# Altium PCB Capstone V2.PcbDoc
Units mil, origin at the board's own origin, x right, y up, seen from the top; angles counter-clockwise.
Board outline 4140 x 3665 mil, 2 copper layers (Top Layer, Bottom Layer), stack 61.756 mil thick; 53 components, 85 nets, 287 pads, 98 vias.
Unrouted connection lines stored in the file: 29.
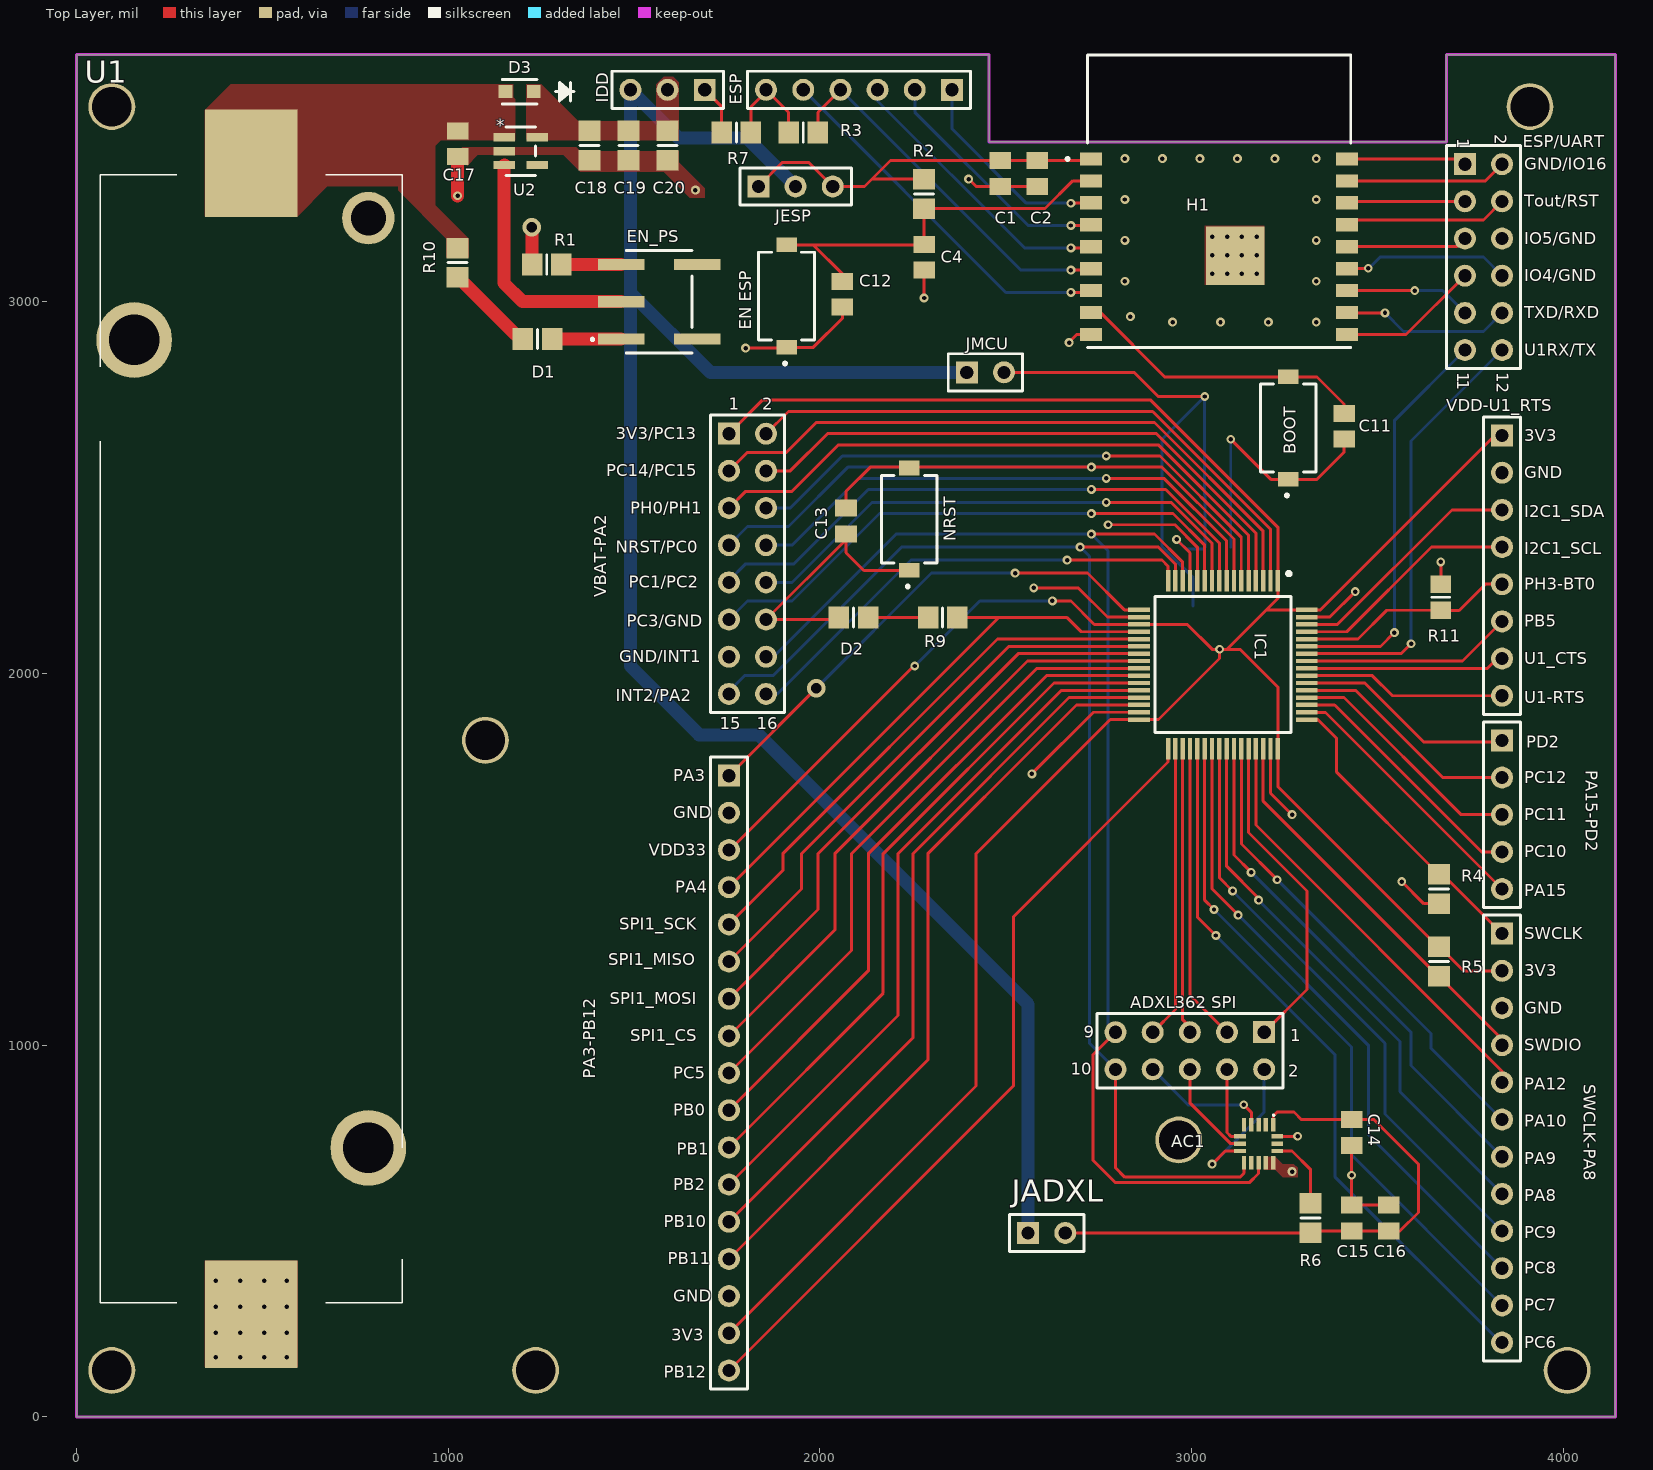
[diagram p0: Top Layer view]
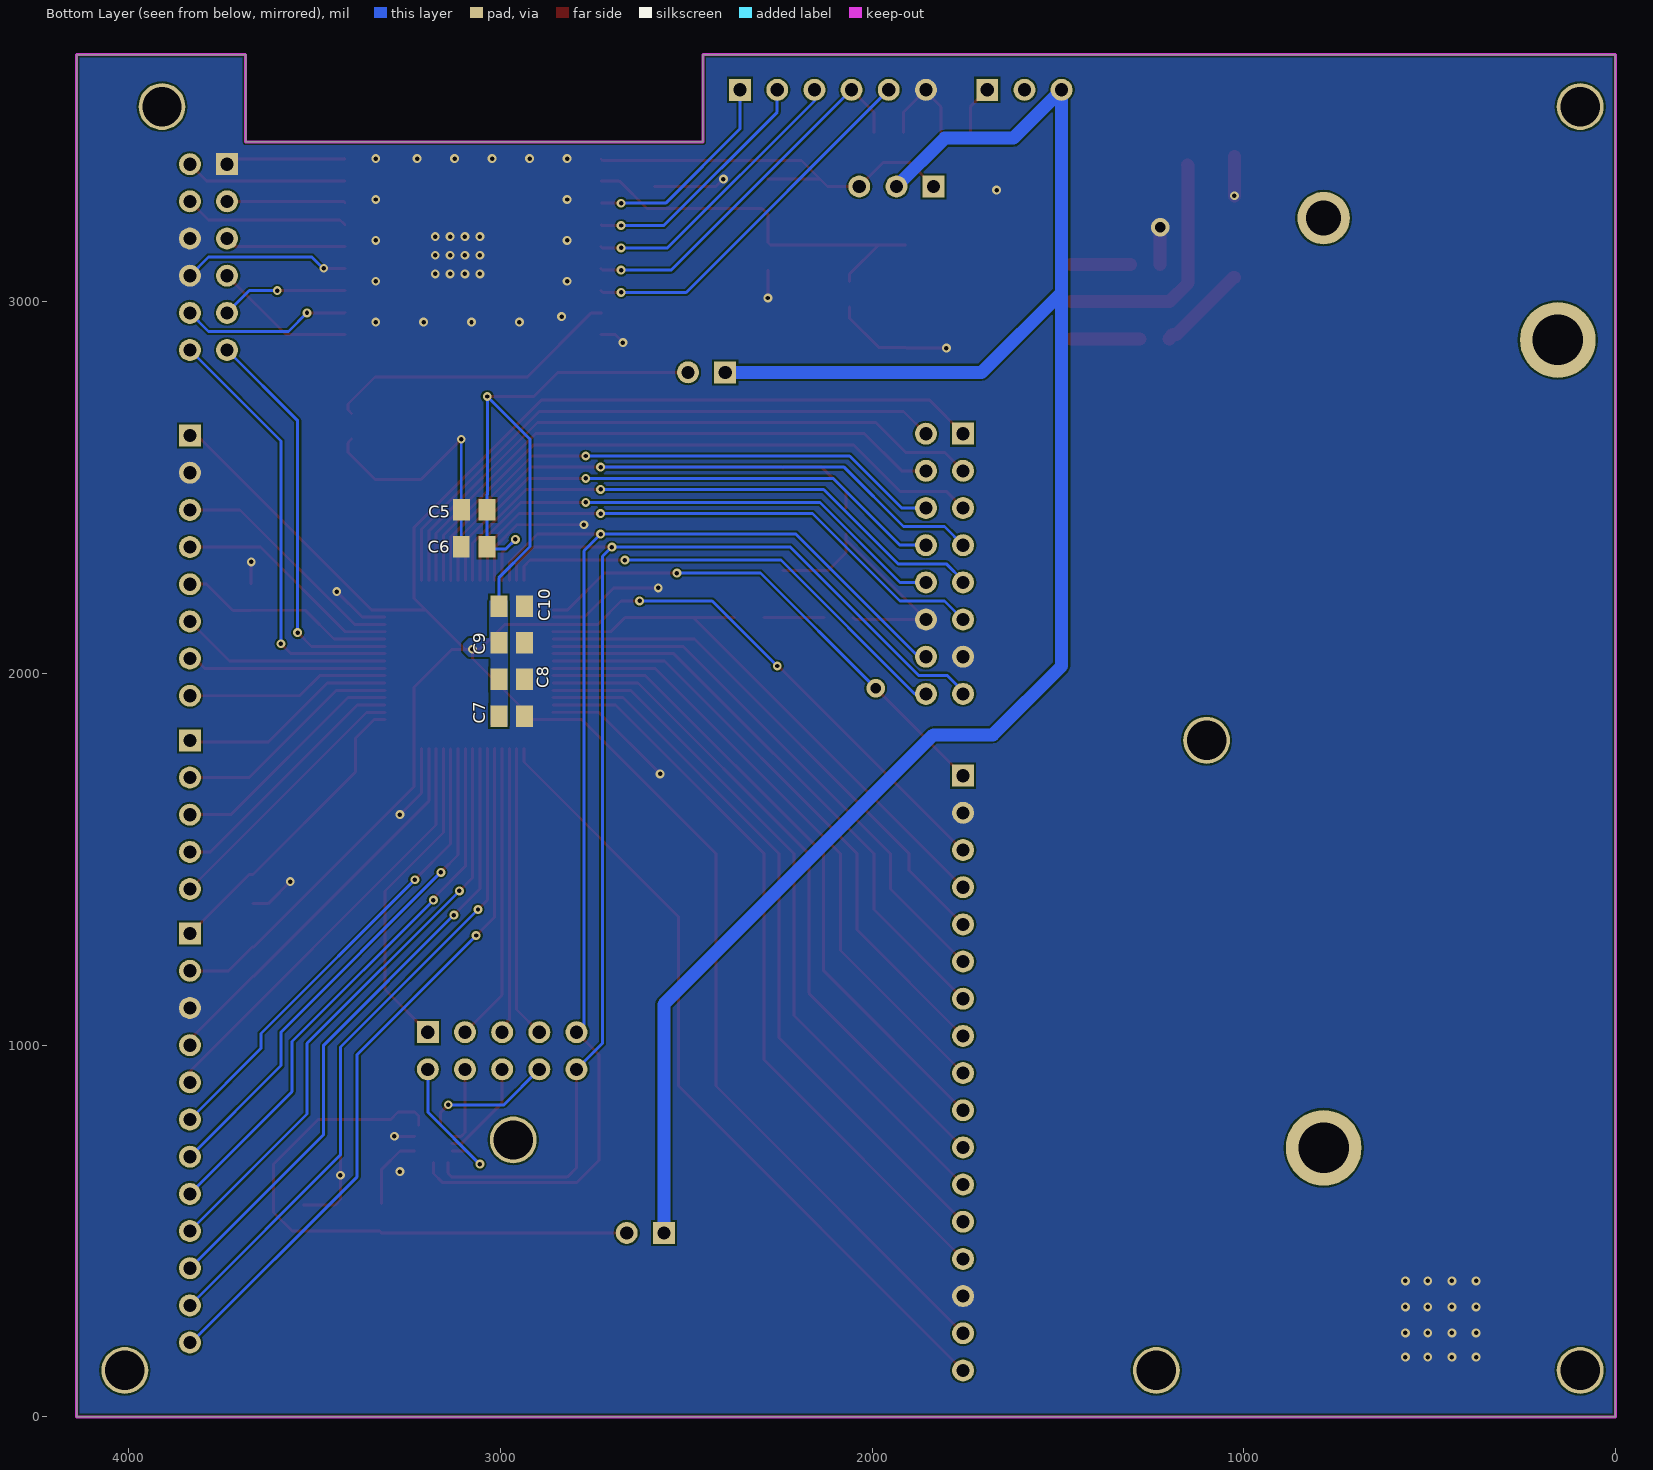
[diagram p1: Bottom Layer view, seen from below]

## Layer stack, top to bottom
Top Solder: solder mask 1, SM-001, Dk 4
Top Layer: signal copper 1.3779
Dielectric 1: core 59, Core-043, Dk 4.3
Bottom Layer: signal copper 1.3779
Bottom Solder: solder mask 1, SM-001, Dk 4

## Board outline
0,0 0,3665 2455,3665 2455,3430 3685,3430 3685,3665 4140,3665 4140,0
cut-out: -830,3120

## Design rules (kind name [scope] priority, off if disabled: settings)
Clearance [All] p1: gap=5 ignorepadtopadclearanceinfootprint=FALSE
DiffPairsRouting [All] p1: maxlimit=10 minlimit=5 mostfreqgap=10 toplayer_minwidth=15 toplayer_maxwidth=15 toplayer_prefwidth=15 bottomlayer_minwidth=15 bottomlayer_maxwidth=15 bottomlayer_prefwidth=15 maxuncoupledlength=500
HoleSize [All] p1: absolutevalues=TRUE maxlimit=200 minlimit=1 maxpercent=80.000 minpercent=20.000
MinimumSolderMaskSliver [All] p1 off: minsoldermaskwidth=0
NetAntennae [All] p1 off: netantennaetolerance=0
PlaneConnect [All] p1: planeconnectstyle=Direct reliefexpansion=15 reliefentries=4 reliefconductorwidth=10 reliefairgap=10
PolygonConnect [All] p1: connectstyle=Direct reliefconductorwidth=10 reliefentries=4 polygonreliefangle="90 Angle" airgapwidth=10
RoutingVias [All] p1: holewidth=12 width=24 viastyle="Through Hole" minholewidth=12 minwidth=24 maxholewidth=28 maxwidth=50
SilkToSilkClearance [All] p1 off: silktosilkclearance=10
SilkToSolderMaskClearance [IsPad] p1 off: minsilkscreentomaskgap=5 clearancetoexposedcopper=TRUE
SolderMaskExpansion [All] p1: expansion=4
Width [All] p1: maxlimit=35 minlimit=5 preferedwidth=8
23 further rules are at their usual default settings.

## Components (designator, comment, footprint, x,y, rotation, side; value= is the part's Value field where it differs from the comment)
AC1 "ADXL362BCCZ-RL7" CC-16-4 3180,735 r270 top
"ADXL362 SPI" "Header 5X2" HDR2X5 3195,1035 r180 top
BOOT "KSR222GLFS" *SW_KSR223GLFG 3260,2660 r90 top
C1 "Cap" *CAPC2012X88N 2485,3345 r270 top value=10uF
C2 "Cap" *CAPC2012X88N 2585,3345 r270 top value=0.1uF
C4 "Cap" *CAPC2012X88N 2280,3120 r270 top value=0.1uF
C5 "Cap" *CAPC2012X88N 3070,2440 r180 bottom value=10nF
C6 "Cap" *CAPC2012X88N 3070.55,2340.59 r180 bottom value=1uF
C7 "Cap" *CAPC2012X88N 2969.49,1885.51 r0 bottom value=4.7uF
C8 "Cap" *CAPC2012X88N 2969.49,1983.85 r0 bottom value=100nF
C9 "Cap" *CAPC2012X88N 2969.49,2082.18 r0 bottom value=100nF
C10 "Cap" *CAPC2012X88N 2969.49,2180.51 r0 bottom value=100nF
C11 "Cap" *CAPC2012X88N 3410,2665 r90 top value=0.1uF
C12 "Cap" *CAPC2012X88N 2060,3020 r90 top value=0.1uF
C13 "Cap" *CAPC2012X88N 2070,2410 r90 top value=0.1uF
C14 "Cap" *CAPC2012X88N 3430,765 r270 top value=1uF
C15 "Cap" *CAPC2012X88N 3430,535 r270 top value=0.1uF
C16 "Cap" *CAPC2012X88N 3530,535 r90 top value=1uF
C17 "Cap" *CAPC2012X88N 1025,3425 r90 top value=1uF
C18 "Cap" 6-0805_M 1380,3420 r90 top value=10uF
C19 "Cap" 6-0805_M 1485,3420 r90 top value=10uF
C20 "Cap" 6-0805_M 1590,3420 r90 top value=4.7uF
D1 "RED_LED" 6-0805_M 1240,2900 r0 top
D2 "GREEN_LED" 6-0805_M 2090,2150 r180 top
D3 "RED_LED" SD0805 1191.75,3565 r180 top
"EN ESP" "KSR222GLFS" *SW_KSR223GLFG 1910,3015 r90 top
EN_PS "GT11MSCBETR" GT11MSCBE 1567.44,3000 r180 top
ESP "Header 6" HDR1X6 2355,3570 r180 top
ESP/UART "Header 6X2" HDR2X6 3735,3370 r270 top
H1 "ESP-WROOM-02D" ESPWROOM02D 3045,3270 r0 top locked
IC1 "STM32L433RCT6" QFP50P1200X1200X160-64N 3084.09,2023.58 r270 top locked
IDD "Header 3" HDR1X3 1690,3570 r180 top
JADXL "Header 2" HDR1X2 2560,495 r0 top
JESP "Header 3" HDR1X3 1834.37,3310 r0 top
JMCU "Header 2" HDR1X2 2395,2810 r0 top
NRST "KSR222GLFS" *SW_KSR223GLFG 2240,2415 r90 top
PA3-PB12 "Header 17" HDR1X17 1755,1725 r270 top
PA15-PD2 "Header 5" HDR1X5 3835,1820 r270 top
R1 "Res1" 6-0805_M 1265,3100 r0 top value=22K
R2 "Res1" 6-0805_M 2280,3290 r270 top value=10K
R3 "Res1" 6-0805_M 1955,3455 r0 top value=10K
R4 "Res1" 6-0805_M 3665,1420 r270 top value=10K
R5 "Res1" 6-0805_M 3665,1225 r90 top value=10k
R6 "Res1" 6-0805_M 3320,535 r270 top value=50
R7 "Res1" 6-0805_M 1775,3455 r0 top value=330K
R9 "Res1" 6-0805_M 2330,2150 r0 top value=470
R10 "Res1" 6-0805_M 1025,3105 r270 top value=470
R11 "Res1" 6-0805_N 3670,2205 r90 top value=10K
SWCLK-PA8 "Header 12" HDR1X12 3835,1300 r270 top
U1 "1042P" 1042P 470.04,1824.41 r90 top
U2 "Part Number: TLV75533PDBVR" DBV5 1195,3405 r0 top value=Value
VBAT-PA2 "Header 8X2" HDR2X8 1755,2645 r270 top
VDD-U1_RTS "Header 8" HDR1X8 3835,2640 r270 top

## Footprints (in the part's own frame and the unit in brackets; to place one, negate y for a bottom-side part, rotate by r counter-clockwise, add the part's x,y. Pads: shape width x height; smd on the part's side, far side on the other; paste and mask are expansions set on the pad)
6-0805_M [mm] "Chip Resistor, Body 2.0x1.2mm, IPC Low Density"
  rect 1.4x1.5 smd: 1(-1,0) 2(1,0)
  silkscreen extent 0,-0.65 0,0.65, body extent -1.07,-0.7 1.07,0.7, height 0.7
6-0805_N [mm] "Chip Resistor, Body 2.0x1.2mm, IPC Medium Density"
  rect 1.2x1.4 smd: 1(-0.9,0) 2(0.9,0)
  silkscreen extent 0,-0.6 0,0.6, body extent -1.07,-0.7 1.07,0.7, height 0.7
1042P [mm]
  round 5.175 hole 3.45: 1(-27.955,-8) 2(27.245,8)
  round 3.585 hole 2.39: 3(35.575,-8)
  rect 7.34x6.35 smd: 4(-39.33,0) 5(39.33,0)
  silkscreen extent -38.53,-10.33 38.53,10.33, body extent -42.37,-10.33 42.37,10.33, height 14.1
*CAPC2012X88N [mm]
  rect 1.16x1.47 smd: 1(-0.875,0) 2(0.875,0)
*SW_KSR223GLFG [mm]
  rect 1x1.4 smd: 1(-3.5,0) 2(3.5,0)
  silkscreen extent -4.7,-1.9 3,1.9
CC-16-4 [mm]
  rect 0.925x0.3 smd: 1(-1.288,1) 2(-1.288,0.5) 3(-1.288,0) 4(-1.288,-0.5) 5(-1.288,-1) 9(1.287,-1) 10(1.287,-0.5) 11(1.287,0) 12(1.287,0.5) 13(1.287,1)
  rect 0.3x0.8 smd: 6(-0.5,-1.275) 7(0,-1.275) 8(0.5,-1.275) 14(0.5,1.275) 15(0,1.275) 16(-0.5,1.275)
  silkscreen extent -1.98,1 -1.93,1.04
DBV5 [mil]
  rect 58x22 smd paste+0 mask+0: 1(-44,37.4) 2(-44,0) 3(-44,-37.4) 4(44,-37.4) 5(44,37.4)
  silkscreen extent -40,-65 40,65, body extent 0,0 10,10, height 10
ESPWROOM02D [mm]
  rect 1.5x0.9 smd: 1(-8.025,2.9) 2(-8.025,1.4) 3(-8.025,-0.1) 4(-8.025,-1.6) 5(-8.025,-3.1) 6(-8.025,-4.6) 7(-8.025,-6.1) 8(-8.025,-7.6) 9(-8.025,-9.1) 10(9.475,-9.1) 11(9.475,-7.6) 12(9.475,-6.1) 13(9.475,-4.6) 14(9.475,-3.1) 15(9.475,-1.6) 16(9.475,-0.1) 17(9.475,1.4) 18(9.475,2.9)
  rect 4x4 smd: 19(1.825,-3.71)
  silkscreen extent -9.72,-10 9.72,10
GT11MSCBE [mm]
  rect 3.17x0.76 smd: 1(2.605,2.54) 2(2.605,0) 3(2.605,-2.54) 4(-2.605,2.54) 6(-2.605,-2.54)
  silkscreen extent -2.25,-3.5 4.61,3.5
HDR1X2 [mm] "Connector; Header; 2 Position"
  rect 1.5x1.5 hole 0.9: 1(0,0)
  round 1.5 hole 0.9: 2(2.54,0)
  silkscreen extent -1.27,-1.27 3.81,1.27
HDR1X3 [mm] "Connector; Header; 3 Position"
  rect 1.5x1.5 hole 0.9: 1(0,0)
  round 1.5 hole 0.9: 2(2.54,0) 3(5.08,0)
  silkscreen extent -1.27,-1.27 6.35,1.27
HDR1X5 [mm] "Connector; Header; 5 Position"
  rect 1.5x1.5 hole 0.9: 1(0,0)
  round 1.5 hole 0.9: 2(2.54,0) 3(5.08,0) 4(7.62,0) 5(10.16,0)
  silkscreen extent -1.27,-1.27 11.43,1.27
HDR1X6 [mm] "Connector; Header; 6 Position"
  rect 1.5x1.5 hole 0.9: 1(0,0)
  round 1.5 hole 0.9: 2(2.54,0) 3(5.08,0) 4(7.62,0) 5(10.16,0) 6(12.7,0)
  silkscreen extent -1.27,-1.27 13.97,1.27
HDR1X8 [mm] "Connector; Header; 8 Position"
  rect 1.5x1.5 hole 0.9: 1(0,0)
  round 1.5 hole 0.9: 2(2.54,0) 3(5.08,0) 4(7.62,0) 5(10.16,0) 6(12.7,0) 7(15.24,0) 8(17.78,0)
  silkscreen extent -1.27,-1.27 19.05,1.27
HDR1X12 [mm] "Connector; Header; 12 Position"
  rect 1.5x1.5 hole 0.9: 1(0,0)
  round 1.5 hole 0.9: 2(2.54,0) 3(5.08,0) 4(7.62,0) 5(10.16,0) 6(12.7,0) 7(15.24,0) 8(17.78,0) 9(20.32,0) 10(22.86,0) 11(25.4,0) 12(27.94,0)
  silkscreen extent -1.27,-1.27 29.21,1.27
HDR1X17 [mm] "Connector; Header; 17 Position"
  rect 1.5x1.5 hole 0.9: 1(0,0)
  round 1.5 hole 0.9: 2(2.54,0) 3(5.08,0) 4(7.62,0) 5(10.16,0) 6(12.7,0) 7(15.24,0) 8(17.78,0) 9(20.32,0) 10(22.86,0) 11(25.4,0) 12(27.94,0) 13(30.48,0) 14(33.02,0) 15(35.56,0) 16(38.1,0) 17(40.64,0)
  silkscreen extent -1.27,-1.27 41.91,1.27
HDR2X5 [mm] "Connector; Header; 5x2 Position"
  rect 1.5x1.5 hole 0.9: 1(0,0)
  round 1.5 hole 0.9: 2(0,2.54) 3(2.54,0) 4(2.54,2.54) 5(5.08,0) 6(5.08,2.54) 7(7.62,0) 8(7.62,2.54) 9(10.16,0) 10(10.16,2.54)
  silkscreen extent -1.27,-1.27 11.43,3.81
HDR2X6 [mm] "Connector; Header; 6x2 Position"
  rect 1.5x1.5 hole 0.9: 1(0,0)
  round 1.5 hole 0.9: 2(0,2.54) 3(2.54,0) 4(2.54,2.54) 5(5.08,0) 6(5.08,2.54) 7(7.62,0) 8(7.62,2.54) 9(10.16,0) 10(10.16,2.54) 11(12.7,0) 12(12.7,2.54)
  silkscreen extent -1.27,-1.27 13.97,3.81
HDR2X8 [mm] "Connector; Header; 8x2 Position"
  rect 1.5x1.5 hole 0.9: 1(0,0)
  round 1.5 hole 0.9: 2(0,2.54) 3(2.54,0) 4(2.54,2.54) 5(5.08,0) 6(5.08,2.54) 7(7.62,0) 8(7.62,2.54) 9(10.16,0) 10(10.16,2.54) 11(12.7,0) 12(12.7,2.54) 13(15.24,0) 14(15.24,2.54) 15(17.78,0) 16(17.78,2.54)
  silkscreen extent -1.27,-1.27 19.05,3.81
QFP50P1200X1200X160-64N [mm]
  rect 1.475x0.3 smd: 1(-5.738,3.75) 2(-5.738,3.25) 3(-5.738,2.75) 4(-5.738,2.25) 5(-5.738,1.75) 6(-5.738,1.25) 7(-5.738,0.75) 8(-5.738,0.25) 9(-5.738,-0.25) 10(-5.738,-0.75) 11(-5.738,-1.25) 12(-5.738,-1.75) 13(-5.738,-2.25) 14(-5.738,-2.75) 15(-5.738,-3.25) 16(-5.738,-3.75) 33(5.738,-3.75) 34(5.738,-3.25) 35(5.738,-2.75) 36(5.738,-2.25) 37(5.738,-1.75) 38(5.738,-1.25) 39(5.738,-0.75) 40(5.738,-0.25) 41(5.738,0.25) 42(5.738,0.75) 43(5.738,1.25) 44(5.738,1.75) 45(5.738,2.25) 46(5.738,2.75) 47(5.738,3.25) 48(5.738,3.75)
  rect 0.3x1.475 smd: 17(-3.75,-5.738) 18(-3.25,-5.738) 19(-2.75,-5.738) 20(-2.25,-5.738) 21(-1.75,-5.738) 22(-1.25,-5.738) 23(-0.75,-5.738) 24(-0.25,-5.738) 25(0.25,-5.738) 26(0.75,-5.738) 27(1.25,-5.738) 28(1.75,-5.738) 29(2.25,-5.738) 30(2.75,-5.738) 31(3.25,-5.738) 32(3.75,-5.738) 49(3.75,5.738) 50(3.25,5.738) 51(2.75,5.738) 52(2.25,5.738) 53(1.75,5.738) 54(1.25,5.738) 55(0.75,5.738) 56(0.25,5.738) 57(-0.25,5.738) 58(-0.75,5.738) 59(-1.25,5.738) 60(-1.75,5.738) 61(-2.25,5.738) 62(-2.75,5.738) 63(-3.25,5.738) 64(-3.75,5.738)
  silkscreen extent -6.35,-4.65 4.65,4.65, body extent -6,-6 6,6, height 1.6
SD0805 [mil]
  rect 37.5x35 smd paste+0 mask+0: 1(-38.25,0) 2(38.25,0)
  silkscreen extent -147,-33 47,33, body extent 0,0 10,10, height 10

## Part data
AC1: "Accelerometer", Manufacturer_Name="Analog Devices", Mouser Part Number=584-ADXL362BCCZ-R7, Datasheet Link=http://www.analog.com/media/en/technical-documentation/data-sheets/ADXL362.pdf, Manufacturer_Part_Number=ADXL362BCCZ-RL7, Mouser Price/Stock=https://www.mouser.com/Search/Refine.aspx?Keyword=584-ADXL362BCCZ-R7
"ADXL362 SPI": "Header, 5-Pin, Dual row", LatestRevisionDate=17-Jul-2002, LatestRevisionNote="Re-released for DXP Platform.", Publisher="Altium Limited"
BOOT "EN ESP" NRST: library part KSR223GLFG, "Switch Tactile N.O. SPST Round Button Gull Wing 0.01A 32VDC 0.2VA 200000Cycles 2N SMD Automotive T/R", Package=None, Digi-Key_Part_Number=401-1704-1-ND, Digi-Key_Purchase_URL=https://www.digikey.com/product-detail/en/c-k/KSR223GLFG/401-1704-1-ND/958078?utm_source=snapeda&utm_medium=aggregator&utm_campaign=symbol, MF=C&K, MP=KSR223GLFG, SnapEDA_Link=https://www.snapeda.com/parts/KSR223GLFG/C%26K/view-part/?ref=snap
C1 C2 C4 C5 C6 C7 C8 C9 C10 C11 C12 C13 C14 C15 C16 C17 C18 C19 C20: "Capacitor", LatestRevisionDate=17-Jul-2002, LatestRevisionNote="Re-released for DXP Platform.", PackageDescription="Radial Cap, Thru-Hole; 2 Leads; 0.3 in Pin Spacing", PackageReference=RAD-0.3, Published=8-Jun-2000, Publisher="Altium Limited"
D1 D2: library part LED3, "Typical BLUE SiC LED", DatasheetVersion=16-Apr-2002, LatestRevisionDate=17-Dec-2003, LatestRevisionNote="PCB Footprint replaced.", PackageDescription="SM LED; 2 C-Bend Leads; Body 3.5 x 2.8 x 1.9 mm, inc leads (LxWxH typ)", PackageReference=3.5X2.8X1.9, PackageVersion=16-Apr-2002, Published=8-Jun-2000, Publisher="Altium Limited"
D3: library part "D Schottky", "Schottky Diode", Code_JEDEC=DO-214-AA, LatestRevisionDate=17-Jul-2002, LatestRevisionNote="Re-released for DXP Platform.", PackageDescription="DO-214-AA/SMB; 2 C-Bend Leads; Body 5.3 x 3.6 mm, inc. leads (LxW)", PackageReference=SMB, Published=8-Jun-2000, Publisher="Altium Limited"
EN_PS: "Switch", Manufacturer_Name="C & K COMPONENTS", Mouser Part Number=611-GT11MSCBETR, Datasheet Link=https://componentsearchengine.com/Datasheets/1/GT11MSCBETR.pdf, Manufacturer_Part_Number=GT11MSCBETR, Mouser Price/Stock=https://www.mouser.com/Search/Refine.aspx?Keyword=611-GT11MSCBETR
ESP: "Header, 6-Pin", LatestRevisionDate=17-Jul-2002, LatestRevisionNote="Re-released for DXP Platform.", Publisher="Altium Limited"
ESP/UART: "Header, 6-Pin, Dual row", LatestRevisionDate=17-Jul-2002, LatestRevisionNote="Re-released for DXP Platform.", Publisher="Altium Limited"
H1: "Hardware", Manufacturer_Name=Espressif, Mouser Part Number=356-ESPWROOM-02D, Datasheet Link=https://br.mouser.com/datasheet/2/891/esp-wroom-02d_esp-wroom-02u_datasheet_en-1365835.pdf, Height=3.2mm, Manufacturer_Part_Number=ESP-WROOM-02D
IC1: "Integrated Circuit", Manufacturer_Name=STMicroelectronics, Mouser Part Number=511-STM32L433RCT6, Datasheet Link=https://www.st.com/resource/en/datasheet/stm32l433rc.pdf, Height=1.6mm, Manufacturer_Part_Number=STM32L433RCT6, Mouser Price/Stock=https://www.mouser.com/Search/Refine.aspx?Keyword=511-STM32L433RCT6
IDD JESP: "Header, 3-Pin", LatestRevisionDate=17-Jul-2002, LatestRevisionNote="Re-released for DXP Platform.", Publisher="Altium Limited"
JADXL JMCU: "Header, 2-Pin", LatestRevisionDate=17-Jul-2002, LatestRevisionNote="Re-released for DXP Platform.", Publisher="Altium Limited"
PA3-PB12: "Header, 17-Pin", LatestRevisionDate=17-Jul-2002, LatestRevisionNote="Re-released for DXP Platform.", Publisher="Altium Limited"
PA15-PD2: "Header, 5-Pin", LatestRevisionDate=17-Jul-2002, LatestRevisionNote="Re-released for DXP Platform.", Publisher="Altium Limited"
R1 R2 R3 R4 R5 R6 R7 R9 R10 R11: "Resistor", LatestRevisionDate=17-Jul-2002, LatestRevisionNote="Re-released for DXP Platform.", PackageDescription="Axial Device, Thru-Hole; 2 Leads; 0.3 in Pin Spacing", PackageReference=AXIAL-0.3, Published=8-Jun-2000, Publisher="Altium Limited"
SWCLK-PA8: "Header, 12-Pin", LatestRevisionDate=17-Jul-2002, LatestRevisionNote="Re-released for DXP Platform.", Publisher="Altium Limited"
U1: "Undefined or Miscellaneous", Manufacturer_Name="Keystone Electronics", Mouser Part Number=534-1042P, Allied_Number=71135189, Allied Price/Stock=https://www.alliedelec.com/keystone-electronics-1042p/71135189/, Datasheet Link=http://www.keyelco.com/product-pdf.cfm?p=13957, Height=14mm, Manufacturer_Part_Number=1042P, Mouser Price/Stock=https://www.mouser.com/Search/Refine.aspx?Keyword=534-1042P
U2: library part TLV75533PDBVR, "No Description Available", Copyright="Copyright (C) 2018 Accelerated Designs. All rights reserved", Manufacturer_Part_Number=TLV75533PDBVR, RefDes=RefDes, Type=DEV, Vendor="Texas Instruments"
VBAT-PA2: "Header, 8-Pin, Dual row", LatestRevisionDate=17-Jul-2002, LatestRevisionNote="Re-released for DXP Platform.", Publisher="Altium Limited"
VDD-U1_RTS: "Header, 8-Pin", LatestRevisionDate=17-Jul-2002, LatestRevisionNote="Re-released for DXP Platform.", Publisher="Altium Limited"

## Free pads (board coordinates)
  round 126 hole 106 unplated: 1(95,3525) 2(95,125) 3(1235,125) 4(1100,1820) 5(4010,125) 6(2965,745) 7(3910,3525)

## Via types
v1: diameter 24, hole 12, Top Layer to Bottom Layer, 96 vias
v2: diameter 50, hole 28, Top Layer to Bottom Layer, 2 vias

## Nets (pads, with @x,y where several pads share a name; then routed paths per layer and width w, separated by ;. In a path a pad name is that pad's centre, name@x,y a point inside that pad or via, vN(x,y) a via of type N, cw(c..) or ccw(c..) an arc to the next point about the centre after c; other vN are vias at no path point)
ADX_IND: IC1.20 PA3-PB12.4 R9.2 | length 1529.8
  Top Layer w8: PA3-PB12.4 2480,2150 ; R9.2 2480,2150 ; IC1.20 2702.83,2112.17 2665,2150 2480,2150
ADXL362_CS: "ADXL362 SPI.2" AC1.8 | length 402.4
  Top Layer w8: v1(3055,680) 3090.32,715.32 AC1.8
  Bottom Layer w8: v1(3055,680) 3195,820 3195,935
ADXL362_INT1: "ADXL362 SPI.9" AC1.11 IC1.14 VBAT-PA2.14 | length 3584.9
  Top Layer w8: v1(2730,2375) 2900,2375 2975.83,2299.17 IC1.14 ; 2795,1035 2735,975 2735,690 2795,630 3155,630 3180,655 AC1.11
  Bottom Layer w8: VBAT-PA2.14 1875,2045 2205,2375 v1(2730,2375) 2775,2330 2775,1055 2795,1035
ADXL362_INT2: "ADXL362 SPI.10" AC1.9 IC1.15 VBAT-PA2.15 | length 3530.8
  Top Layer w8: v1(2700,2340) 2910,2340 2956.14,2293.86 IC1.15 ; 2795,935 2795,670 2820,645 3130,645 3140.63,655.63 AC1.9
  Bottom Layer w8: VBAT-PA2.15 1755,1952.02 1797.98,1995 1875,1995 2220,2340 v1(2700,2340) 2725,2315 2725,2230 2725,1005 2795,935
ADXL362_MISO: "ADXL362 SPI.6" AC1.7 | length 270.4
  Top Layer w8: 2995,935 2995,845 3105,735 AC1.7
ADXL362_MOSI: "ADXL362 SPI.4" AC1.6 | length 209.1
  Top Layer w8: 3095,935 3095,765 3105.31,754.69 AC1.6
ADXL362_SCK: "ADXL362 SPI.8" AC1.4 | length 346.9
  Top Layer w8: v1(3140,839.67) 3160.32,819.35 AC1.4
  Bottom Layer w8: 2895,935 2990.33,839.67 v1(3140,839.67)
EN: "EN ESP.2" C4.1 C12.2 H1.2 R2.2 | length 1065.3
  Top Layer w8: 1910,3152.8 1982.2,3152.8 ; C12.2 2060,3075 1982.2,3152.8 ; H1.2 2680.12,3325.12 2605.63,3250.63 2295.63,3250.63 2280,3235 2280,3159.45 2273.35,3152.8 1982.2,3152.8
GND: "EN ESP.1" AC1.12 AC1.13 AC1.16 BOOT.1 C1.2 C2.2 C4.2 C5.1 C6.1 C7.1 C8.1 C9.1 C10.1 C11.1 C12.1 C13.1 C14.2 C15.1 C16.2 C17.1 C18.1 C19.1 C20.1 D2.2 ESP.6 ESP/UART.1 ESP/UART.6 ESP/UART.8 H1.9 H1.13 H1.18 H1.19 IC1.12 IC1.18 IC1.31 IC1.47 IC1.63 NRST.1 PA3-PB12.2 PA3-PB12.15 R1.1 R3.1 R4.2 R7.2 R11.2 SWCLK-PA8.3 U1.4 U2.2 VBAT-PA2.12 VBAT-PA2.13 VDD-U1_RTS.2 | length 5254.4
  Top Layer w8: v1(1800,2875) 1907.79,2875 1910,2877.2 1982.2,2877.2 2060,2955 C12.1 ; R7.2 1814.37,3524.37 1857.5,3567.5 1915.63,3509.37 R3.1 ; D2.2 2045.63,2145 VBAT-PA2.12 2070,2360 C13.1 2070,2325 2117.79,2277.2 NRST.1 ; v1(2280,3010) C4.2 ; v1(2400,3330) 2419.45,3310.55 C2.2 ; v1(2570,1730) 2735.63,1895.63 IC1.31 ; v1(2575,2230) 2695,2230 2773.46,2151.54 IC1.18 ; v1(2670,2890) 2670,2891.21 2690.52,2911.73 H1.9 ; v1(2775,2400) 2955,2400 3015.2,2339.8 IC1.12 ; v1(3105,2630) 3212.8,2522.2 BOOT.1 3337.2,2522.2 3410,2595 3410,2620.55 C11.1@3400,2630.55 ; IC1.47 3212.05,1677.95 v1(3270,1620) ; AC1.16 3230.35,754.84 3284.84,754.84 v1(3285,755) ; IC1.63 3371.54,2151.54 v1(3440,2220) ; H1.13 3419.13,3090 v1(3475,3090) ; H1.18@3418.86,3385 H1.18 3720.83,3384.17 ESP/UART.1 ; C14.2 v1(3430,650) 3430,585 3445.55,569.45 C16.2 ; v1(3565,1440) 3624.37,1380.63 R4.2 ; R11.2 v1(3670,2300)
  Top Layer w35: v1(1025,3285) C17.1 ; v2(1225,3200) 1225,3100.63 R1.1 R1.1@1225.31,3100.31
  Bottom Layer w8: C6.1 v1(3105,2630) ; v1(3475,3090) 3477.13,3090 3507.13,3120 3785,3120 ESP/UART.8
  other v1: 375.04,160.98 440.04,160.98 505.04,160.98 565.04,160.98 375.04,225.98 440.04,225.98 505.04,225.98 565.04,225.98 375.04,295.98 440.04,295.98 505.04,295.98 565.04,295.98 375.04,365.98 440.04,365.98 505.04,365.98 565.04,365.98 3270,660 2948.75,2945 3077.5,2945 3206.25,2945 3335,2945 2835,2960 2820,3055 3335,3055 3055,3075 3095,3075 3135,3075 3175,3075 3055,3125 3095,3125 3135,3125 3175,3125 2820,3165 3335,3165 3055,3175 3095,3175 3135,3175 3175,3175 2820,3275 3335,3275 1665,3300 2820,3385 2921,3385 3022,3385 3123,3385 3224,3385 3335,3385
I2C1_SCL: IC1.61 VDD-U1_RTS.4 | length 619.4
  Top Layer w8: IC1.61 3417.17,2112.17 3645,2340 VDD-U1_RTS.4
I2C1_SDA: IC1.62 VDD-U1_RTS.3 | length 652.6
  Top Layer w8: IC1.62 3391.85,2131.85 3700,2440 VDD-U1_RTS.3
IO0: BOOT.2 C11.2 H1.8 | length 813.7
  Top Layer w8: H1.8@2727.72,2969.45 2728.27,2970 2755,2970 2927.2,2797.8 BOOT.2 3337.2,2797.8 3410,2725 3410,2709.45 C11.2@3400,2699.45
IO2: ESP.5 H1.7 | length 1001.8
  Top Layer w8: v1(2675,3025) 2724.21,3025 H1.7
  Bottom Layer w8: ESP.5 2500,3025 v1(2675,3025)
IO4: ESP/UART.7 H1.10 | length 382.5
  Top Layer w8: H1.10 3576.73,2911.73 ESP/UART.7
IO5: ESP/UART.5 H1.14 | length 326.1
  Top Layer w8: H1.14 3712.95,3147.95 ESP/UART.5
IO12: ESP.2 H1.4 | length 661.2
  Top Layer w8: v1(2675,3205) 2727.05,3205 H1.4
  Bottom Layer w8: ESP.2 2255,3510 2560,3205 v1(2675,3205)
IO13: ESP.3 H1.5 | length 768.9
  Top Layer w8: v1(2675,3145) 2726.1,3145 H1.5
  Bottom Layer w8: ESP.3 2155,3540 2550,3145 v1(2675,3145)
IO14: ESP.1 H1.3 | length 560.8
  Top Layer w8: v1(2675,3265) H1.3@2727.99,3265
  Bottom Layer w8: ESP.1 2355,3465 2555,3265 v1(2675,3265)
IO15: ESP.4 H1.6 R3.2 | length 1016.7
  Top Layer w8: R3.2 1994.37,3509.37 ESP.4 ; v1(2675,3085) 2725.16,3085 H1.6
  Bottom Layer w8: ESP.4 2540,3085 v1(2675,3085)
IO16: ESP/UART.2 H1.17 | length 435.7
  Top Layer w8: H1.17@3418.15,3325 H1.17 3790.12,3325.12 ESP/UART.2
NetAC1_1: AC1.1 C14.1 C15.2 C16.1 JADXL.2 R6.2 | length 1579.5
  Top Layer w8: JADXL.2 3319.37,495 R6.2 3324.92,500.55 C15.2 C16.1 3560.55,500.55 3610,550 3610,680 3490.55,799.45 C14.1 3295.55,799.45 3275,820 3230,820 3219.37,809.37 AC1.1
NetAC1_14: AC1.14 R6.1 | length 201.3
  Top Layer w8: AC1.14 3269.68,715.32 3320,665 R6.1
NetBT1_1: C17.2 D3.2 R10.1 U1.5 U2.1
NetC18_2: C18.2 C19.2 C20.2 D3.1 IDD.2 U2.5
NetD1_1: D1.1 R10.2 | length 246
  Top Layer w35: R10.2 1026.97,3065.63 1180.57,2912.03 1190.57,2912.03 1200.31,2902.28 1200.31,2899.69 D1.1
NetD1_2: D1.2 EN_PS.1 | length 185.5
  Top Layer w35: D1.2 EN_PS.1
NetD2_1: D2.1 R9.1 | length 161.3
  Top Layer w8: D2.1 R9.1
NetEN_PS_2: EN_PS.2 U2.3 | length 653.6
  Top Layer w35: U2.3 1150,3366.6 1150,3050 1200,3000 EN_PS.2
NetEN_PS_3: EN_PS.3 R1.2 | length 160.5
  Top Layer w35: R1.2 EN_PS.3
NetIDD_1: IDD.1 R7.1 | length 133.9
  Top Layer w8: IDD.1 1735.63,3524.37 R7.1
NRST: C13.2 IC1.7 NRST.2 VBAT-PA2.7 | length 2368.9
  Top Layer w8: C13.2 2070,2490 2135,2555 NRST.2@2237.79,2555 ; NRST.2 2242.2,2555 v1(2730,2555) 2920,2555 3113.62,2361.38 IC1.7
  Bottom Layer w8: VBAT-PA2.7 1805,2395 1915,2395 2075,2555 v1(2730,2555)
PA2: IC1.16 VBAT-PA2.16 | length 1276.4
  Top Layer w8: v1(2665,2305) 2920,2305 2936.46,2288.54 IC1.16
  Bottom Layer w8: VBAT-PA2.16 1885,1945 2245,2305 v1(2665,2305)
PA3: IC1.17 PA3-PB12.1 | length 1369.8
  Top Layer w8: PA3-PB12.1 v2(1990,1960) ; v1(2525,2270) 2720,2270 2818.78,2171.22 IC1.17
  Bottom Layer w8: v2(1990,1960) 2300,2270 v1(2525,2270)
PA8: IC1.41 SWCLK-PA8.8 | length 1504.6
  Top Layer w8: IC1.41 3093.94,1481.06 3180,1395 v1(3180,1390)
  Bottom Layer w8: v1(3180,1390) 3560,1010 3560,875 SWCLK-PA8.8
PA9: IC1.42 SWCLK-PA8.7 | length 1396.5
  Top Layer w8: IC1.42 3113.62,1511.38 v1(3160,1465)
  Bottom Layer w8: v1(3160,1465) 3590,1035 3590,945 SWCLK-PA8.7
PA10: IC1.43 SWCLK-PA8.6 | length 1287.3
  Top Layer w8: IC1.43@3134,1796.98 3134,1541 v1(3230,1445)
  Bottom Layer w8: v1(3230,1445) 3643.5,1031.5 3643.5,991.5 SWCLK-PA8.6
PA12: IC1.45 SWCLK-PA8.5 | length 1172
  Top Layer w8: IC1.45 3172.68,1592.32 3835,930 SWCLK-PA8.5
PA15: IC1.50 PA15-PD2.5 | length 721.8
  Top Layer w8: IC1.50@3310,1895 3360,1895 PA15-PD2.5
PB0: IC1.26 PA3-PB12.10 | length 1771.9
  Top Layer w8: PA3-PB12.10 2130,1200 2130,1515 2609.06,1994.06 IC1.26
PB1: IC1.27 PA3-PB12.11 | length 1840.4
  Top Layer w8: PA3-PB12.11 2170,1140 2170,1515 2629.37,1974.37 IC1.27
PB2: IC1.28 PA3-PB12.12 | length 1908.8
  Top Layer w8: PA3-PB12.12 2210,1080 2210,1515 2649.69,1954.69 IC1.28
PB5: IC1.57 VDD-U1_RTS.6 | length 569.1
  Top Layer w8: IC1.57 3728.43,2033.43 VDD-U1_RTS.6
PB10: IC1.29 PA3-PB12.13 | length 1977.2
  Top Layer w8: PA3-PB12.13 2250,1020 2250,1515 2670,1935 IC1.29
PB11: IC1.30 PA3-PB12.14 | length 2045.6
  Top Layer w8: PA3-PB12.14 2290,960 2290,1515 2600,1825 2690.32,1915.32 IC1.30
PB12: IC1.33 PA3-PB12.17 | length 2162.1
  Top Layer w8: PA3-PB12.17 2520,890 2520,1345 2936.46,1761.46 IC1.33
PC0: IC1.8 VBAT-PA2.8 | length 1490
  Top Layer w8: v1(2770,2525) 2925,2525 3093.94,2356.06 IC1.8
  Bottom Layer w8: VBAT-PA2.8 1925,2345 2105,2525 v1(2770,2525)
PC1: IC1.9 VBAT-PA2.9 | length 1586.7
  Top Layer w8: v1(2730,2495) 2930,2495 3074.25,2350.75 IC1.9
  Bottom Layer w8: VBAT-PA2.9 1755,2250 1800,2295 1930,2295 2130,2495 v1(2730,2495)
PC2: IC1.10 VBAT-PA2.10 | length 1435
  Top Layer w8: v1(2770,2460) 2945,2460 3054.57,2350.43 IC1.10
  Bottom Layer w8: VBAT-PA2.10 1925,2245 2140,2460 v1(2770,2460)
PC3: IC1.11 VBAT-PA2.11 | length 1528.7
  Top Layer w8: v1(2730,2430) 2950,2430 3034.88,2345.12 IC1.11
  Bottom Layer w8: VBAT-PA2.11 1805,2195 1925,2195 2160,2430 v1(2730,2430)
PC5: IC1.25 PA3-PB12.9 | length 1706.5
  Top Layer w8: PA3-PB12.9 2085,1255 2085,1515 2583.74,2013.74 IC1.25
PC6: IC1.37 SWCLK-PA8.12 | length 1939.7
  Top Layer w8: IC1.37 3015,1797.48 3015,1345 v1(3065,1295)
  Bottom Layer w8: v1(3065,1295) 3385,975 3385,646.16 3831.16,200 SWCLK-PA8.12
PC7: IC1.38 SWCLK-PA8.11 | length 1829.1
  Top Layer w8: IC1.38 3035,1797.56 3035,1390 v1(3060,1365)
  Bottom Layer w8: v1(3060,1365) 3430,995 3430,705 SWCLK-PA8.11
PC8: IC1.39 SWCLK-PA8.10 | length 1720.9
  Top Layer w8: IC1.39 3055,1797.24 3055,1420 v1(3125,1350)
  Bottom Layer w8: v1(3125,1350) 3475,1000 3475,760 SWCLK-PA8.10
PC9: IC1.40 SWCLK-PA8.9 | length 1612.8
  Top Layer w8: IC1.40 3074.25,1450.75 v1(3110,1415)
  Bottom Layer w8: v1(3110,1415) 3520,1005 3520,815 SWCLK-PA8.9
PC10: IC1.51 PA15-PD2.4 | length 688.7
  Top Layer w8: IC1.51 3384.68,1915.32 3780,1520 PA15-PD2.4
PC11: IC1.52 PA15-PD2.3 | length 655.5
  Top Layer w8: IC1.52 3410,1935 3725,1620 PA15-PD2.3
PC12: IC1.53 PA15-PD2.2 | length 622.2
  Top Layer w8: IC1.53 3440.31,1954.69 3675,1720 PA15-PD2.2
PC13: IC1.2 VBAT-PA2.2 | length 1651.7
  Top Layer w8: VBAT-PA2.2 1915,2705 2895,2705 3212.05,2387.95 IC1.2
PC14: IC1.3 VBAT-PA2.3 | length 1745.5
  Top Layer w8: VBAT-PA2.3 1805,2595 1910,2595 1990,2675 2900,2675 3192.36,2382.64 IC1.3
PC15: IC1.4 VBAT-PA2.4 | length 1597.8
  Top Layer w8: VBAT-PA2.4 1920,2545 2020,2645 2905,2645 3172.68,2377.32 IC1.4
PD2: IC1.54 PA15-PD2.1 | length 593.1
  Top Layer w8: IC1.54 3465.63,1974.37 3625,1815 3830,1815 PA15-PD2.1
PH0: IC1.5 VBAT-PA2.5 | length 1691.6
  Top Layer w8: VBAT-PA2.5 1800,2490 1925,2490 2050,2615 2910,2615 3152.99,2372.01 IC1.5
PH1: IC1.6 VBAT-PA2.6 | length 1543.9
  Top Layer w8: v1(2770,2585) 2915,2585 3133.31,2366.69 IC1.6
  Bottom Layer w8: VBAT-PA2.6 1920,2445 2060,2585 v1(2770,2585)
PH3-BOOT0: IC1.60 R11.1 VDD-U1_RTS.5 | length 586.5
  Top Layer w8: IC1.60 3447.48,2092.48 3525,2170 3669.57,2170 R11.1 3719.57,2169.57 3790,2240 VDD-U1_RTS.5
RST: ESP/UART.4 H1.15 | length 443.1
  Top Layer w8: H1.15 3431.02,3220 3785,3220 ESP/UART.4
RXD: ESP/UART.10 H1.11 | length 458.7
  Top Layer w8: H1.11 3418.82,2970 v1(3520,2970)
  Bottom Layer w8: v1(3520,2970) 3570,2920 3785,2920 ESP/UART.10
SPI1_CS: IC1.24 PA3-PB12.8 | length 1641
  Top Layer w8: PA3-PB12.8 2040,1310 2040,1515 2558.43,2033.43 IC1.24
SPI1_MISO: IC1.22 PA3-PB12.6 | length 1510
  Top Layer w8: PA3-PB12.6 1950,1420 1950,1515 2507.8,2072.8 IC1.22
SPI1_MOSI: IC1.23 PA3-PB12.7 | length 1575.5
  Top Layer w8: PA3-PB12.7 1995,1365 1995,1515 2533.11,2053.11 IC1.23
SPI1_SCK: IC1.21 PA3-PB12.5 | length 1447.4
  Top Layer w8: PA3-PB12.5 1900,1470 1900,1515 2477.48,2092.48 IC1.21
SPI2_CS: "ADXL362 SPI.1" IC1.44 | length 875.3
  Top Layer w8: IC1.44 3152.99,1572.01 3310,1415 3310,1150 3195,1035
SPI2_MISO: "ADXL362 SPI.5" IC1.35 | length 770.6
  Top Layer w8: IC1.35 2975.83,1068.19 2995,1049.02 2995,1035
SPI2_MOSI: "ADXL362 SPI.3" IC1.36 | length 803.9
  Top Layer w8: IC1.36 2995.51,1134.49 3095,1035
SPI2_SCK: "ADXL362 SPI.7" IC1.34 | length 788
  Top Layer w8: 2895,1035 2956.14,1096.14 IC1.34
SWCLK: IC1.49 R4.1 SWCLK-PA8.1 | length 816.7
  Top Layer w8: IC1.49 3339.05,1875.95 3390,1825 3390,1734.37 R4.1 3675.63,1459.37 SWCLK-PA8.1
SWDIO: IC1.46 R5.1 SWCLK-PA8.4 | length 1065
  Top Layer w8: IC1.46 3192.36,1656.3 3663.03,1185.63 R5.1 3835,1015.63 SWCLK-PA8.4
Tout: ESP/UART.3 H1.16 | length 318.6
  Top Layer w8: H1.16 3421.97,3270 ESP/UART.3
TXD: ESP/UART.9 H1.12 | length 341.9
  Top Layer w8: H1.12 3418.19,3030 v1(3600,3030)
  Bottom Layer w8: v1(3600,3030) 3675,3030 ESP/UART.9
U1_CTS: IC1.56 VDD-U1_RTS.7 | length 535.9
  Top Layer w8: IC1.56 3795.47,2013.74 3821.73,2040 VDD-U1_RTS.7
U1_RTS: IC1.55 VDD-U1_RTS.8 | length 547.4
  Top Layer w8: IC1.55 3485.94,1994.06 3540,1940 VDD-U1_RTS.8
U1_RX: ESP/UART.11 IC1.59 | length 1089.1
  Top Layer w8: IC1.59 3507.8,2072.8 v1(3545,2110)
  Bottom Layer w8: v1(3545,2110) 3545,2680 ESP/UART.11
U1_TX: ESP/UART.12 IC1.58 | length 1182.6
  Top Layer w8: IC1.58 3563.11,2053.11 v1(3590,2080)
  Bottom Layer w8: v1(3590,2080) 3590,2625 ESP/UART.12
VDD33: IDD.3 JADXL.1 JESP.2 JMCU.1 | length 5158.1
  Bottom Layer w35: JESP.2 1804.37,3440 1620,3440 IDD.3 1490,3025 ; JMCU.1 1705,2810 1490,3025 ; JADXL.1 2560,1110 1835,1835 1675,1835 1490,2020 1490,3025
VDD_ESP: C1.1 C2.1 H1.1 JESP.1 JESP.3 R2.1 | length 1120
  Top Layer w8: JESP.1 1899.37,3375 1969.37,3375 JESP.3 2120,3310 2140,3330 ; R2.1 2279.37,3330 2140,3330 ; H1.1 2724.33,3379.45 C2.1 2495,3379.45 2494.45,3380 2190,3380 2140,3330
VDD_MCU: C5.2 C6.2 C7.2 C8.2 C9.2 C10.2 IC1.1 IC1.13 IC1.19 IC1.32 IC1.48 IC1.64 JMCU.2 PA3-PB12.3 PA3-PB12.16 R5.2 SWCLK-PA8.2 VBAT-PA2.1 VDD-U1_RTS.1 | length 10090.8
  Top Layer w8: PA3-PB12.16 2420,890 2420,1515 2780.95,1875.95 IC1.32 2910.95,1875.95 3075,2040 v1(3075,2065) ; PA3-PB12.3 1757.5,1525 2252.5,2020 v1(2255,2020) ; VBAT-PA2.1 1845,2735 2890,2735 3231.73,2393.27 IC1.1 3231.73,2201.73 3201.22,2171.22 ; JMCU.2 2845,2810 2910,2745 v1(3035,2745) ; v1(2625,2195) 2675,2195 2738.15,2131.85 IC1.19 2988.15,2131.85 3055,2065 v1(3075,2065) ; v1(2959.37,2360.62) 2995.51,2324.49 IC1.13 ; SWCLK-PA8.2 3731.34,1200 3666.97,1264.37 R5.2 3663.03,1264.37 3231.73,1695.67 IC1.48 3231.73,1963.27 3130,2065 3095,2065 ; VDD-U1_RTS.1 3815,2640 3346.22,2171.22 IC1.64 3201.22,2171.22 ; v1(3075,2065) 3095,2065 ; 3095,2065 3201.22,2171.22
  Bottom Layer w8: v1(2255,2020) 2430,2195 v1(2625,2195) ; v1@2960,2360 2985,2335 3030.51,2335 C6.2 3036.1,2435.59 3036.1,2480 3035,2481.1 v1(3035,2745) 2920,2630 2920,2341.25 3003.93,2257.31 C10.2@3003.93,2181.06
pads on no net: AC1.2 AC1.3 AC1.5 AC1.10 AC1.15 EN_PS.4 EN_PS.6 U1.1 U1.2 U1.3 U2.4

## Polygon pours and split planes (outlines as drawn)
GND on Top Layer "ADX_GND" (solid, pour order 70): 3195,700 3195,665 3225,665 3245,645 3285,645 3285,670 3275,680 3245,680 3225,700
GND on Top Layer "LDO_GND" (solid, pour order 68): 1005,3415 1345,3415 1355,3405 1620,3405 1620,3375 1690,3305 1690,3280 1650,3280 1580,3350 1355,3350 1310,3395 1080,3395 1045,3360 1045,3280 1030,3265 1015,3265 1000,3280 1000,3410
NetBT1_1 on Top Layer "BATTERY+" (solid, pour order 66): 345,3515 345,3230 595,3230 675,3310 865,3310 865,3300 995,3170 995,3120 1055,3120 1055,3170 965,3260 965,3420 980,3435 1180,3435 1180,3545 1175,3550 1175,3585 415,3585
NetC18_2 on Top Layer "LDO_OUT" (solid, pour order 62): 1210,3430 1210,3585 1250,3585 1350,3485 1560,3485 1560,3585 1580,3605 1605,3605 1620,3590 1620,3435 1215,3435
GND on Top Layer "BATTERY-" (solid, pour order 58): 345,420 345,135 595,135 595,420
GND on Top Layer "ESP_GND" (solid, pour order 24): 3035,3205 3035,3045 3195,3045 3195,3205
GND on Bottom Layer "BOTGND" (solid, pour order 74): 5,3660 5,5 4135,5 4135,3660 3690,3660 3690,3425 2450,3425 2450,3660
VDD_MCU on Bottom Layer "BOTVDD_MCU" (solid, pour order 56): 2980,2195 2980,1860 3025,1860 3025,2040 3030,2045 3085,2045 3100,2060 3100,2080 3085,2095 3030,2095 3030,2195

## Keep-outs
Keep-Out Layer:
  the board outline again, w8

## Silkscreen, mask and mechanical layers (free items; w line width, h text height)
Top Overlay:
  text "GND/IO16" at 3895,3355 h32
  text "Tout/RST" at 3895,3255 h32
  text "IO5/GND" at 3895,3155 h32
  text "IO4/GND" at 3895,3055 h32
  text "TXD/RXD" at 3895,2955 h32
  text "U1RX/TX" at 3895,2855 h32
  text "3V3/PC13" at 1450,2630 h32
  text "3V3" at 3895,2625 h32
  text "PC14/PC15" at 1425,2530 h32
  text "GND" at 3895,2525 h32
  text "PH0/PH1" at 1490,2430 h32
  text "I2C1_SDA" at 3895,2420 h32
  text "NRST/PC0" at 1450,2325 h32
  text "I2C1_SCL" at 3895,2320 h32
  text "PC1/PC2" at 1485,2230 h32
  text "PH3-BT0" at 3895,2225 h32
  text "PC3/GND" at 1480,2125 h32
  text "PB5" at 3895,2125 h32
  text "GND/INT1" at 1460,2030 h32
  text "U1_CTS" at 3895,2025 h32
  text "INT2/PA2" at 1450,1925 h32
  text "U1-RTS" at 3895,1920 h32
  text "PD2" at 3900,1800 h32
  text "PA3" at 1605,1710 h32
  text "PC12" at 3895,1705 h32
  text "GND" at 1605,1610 h32
  text "PC11" at 3895,1605 h32
  text "VDD33" at 1540,1510 h32
  text "PC10" at 3895,1505 h32
  text "PA4" at 1610,1410 h32
  text "PA15" at 3895,1400 h32
  text "SPI1_SCK" at 1460,1310 h32
  text "SWCLK" at 3895,1285 h32
  text "SPI1_MISO" at 1430,1215 h32
  text "3V3" at 3895,1185 h32
  text "SPI1_MOSI" at 1435,1110 h32
  text "GND" at 3895,1085 h32
  text "SPI1_CS" at 1490,1010 h32
  text "SWDIO" at 3895,985 h32
  text "PC5" at 1605,910 h32
  text "PA12" at 3895,880 h32
  text "PB0" at 1605,810 h32
  text "PA10" at 3895,780 h32
  text "PB1" at 1615,705 h32
  text "PA9" at 3895,680 h32
  text "PB2" at 1605,610 h32
  text "PA8" at 3895,580 h32
  text "PB10" at 1580,510 h32
  text "PC9" at 3895,480 h32
  text "PB11" at 1590,410 h32
  text "PC8" at 3895,385 h32
  text "GND" at 1605,310 h32
  text "PC7" at 3895,285 h32
  text "3V3" at 1600,205 h32
  text "PC6" at 3895,185 h32
  text "PB12" at 1580,105 h32

## Dimensions
0,3665 to 0,0 on Mechanical 1
0,0 to 4130,-5 on Mechanical 1

## Text inside footprints (layer, text, board x,y; h text height)
"ADXL362 SPI": Top Overlay "10" at 2675,920 h32; Top Overlay "9" at 2710,1020 h32; Top Overlay "1" at 3265,1010 h32; Top Overlay "2" at 3260,915 h32
ESP/UART: Top Overlay "12" at 3820,2810 h32 r270; Top Overlay "1" at 3715,2790 h32 r270; Top Overlay "1" at 3715,2810 h32 r270; Top Overlay "1" at 3715,3440 h32 r270; Top Overlay "2" at 3815,3450 h32 r270
U2: Top Overlay "*" at 1128.5,3459.4 h32; Mechanical 13 "*" at 1158,3421.4 h32
VBAT-PA2: Top Overlay "2" at 1845,2710 h32; Top Overlay "1" at 1755,2710 h32; Top Overlay "15" at 1730,1850 h32; Top Overlay "16" at 1830,1850 h32